# Altium PCB mainPCB.PcbDoc
Units mm, origin at the board's own origin, x right, y up, seen from the top; angles counter-clockwise.
Board outline 100 x 50 mm, 2 copper layers (Top Layer, Bottom Layer); 13 components, 5 nets, 76 pads, 0 vias.
Unrouted connection lines stored in the file: 1.
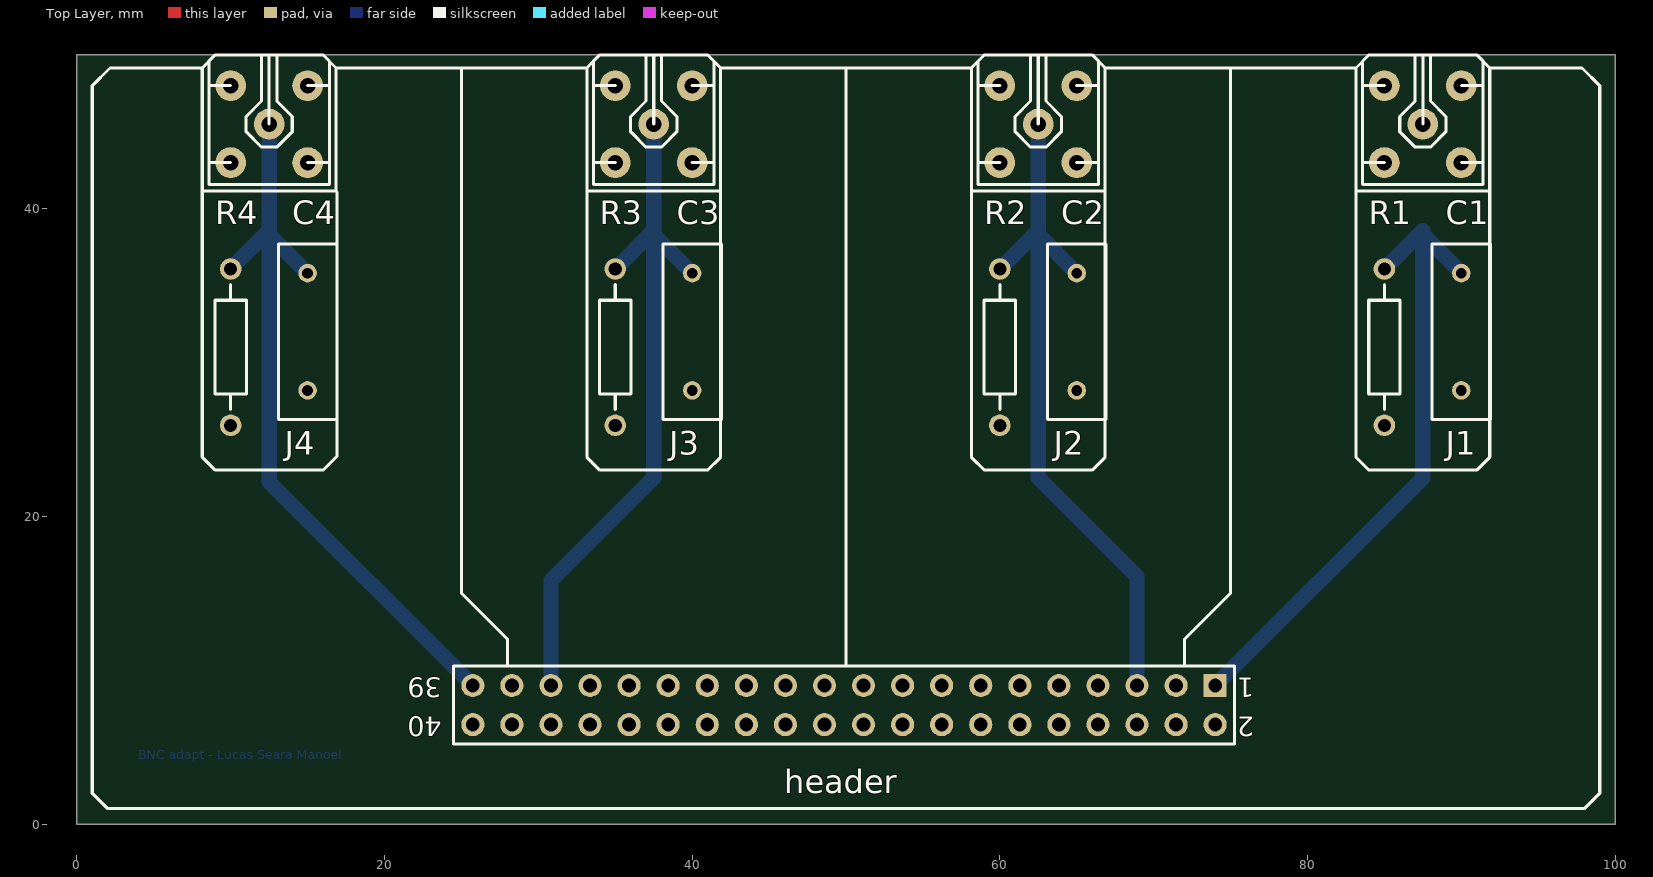
[diagram p0: Top Layer view]
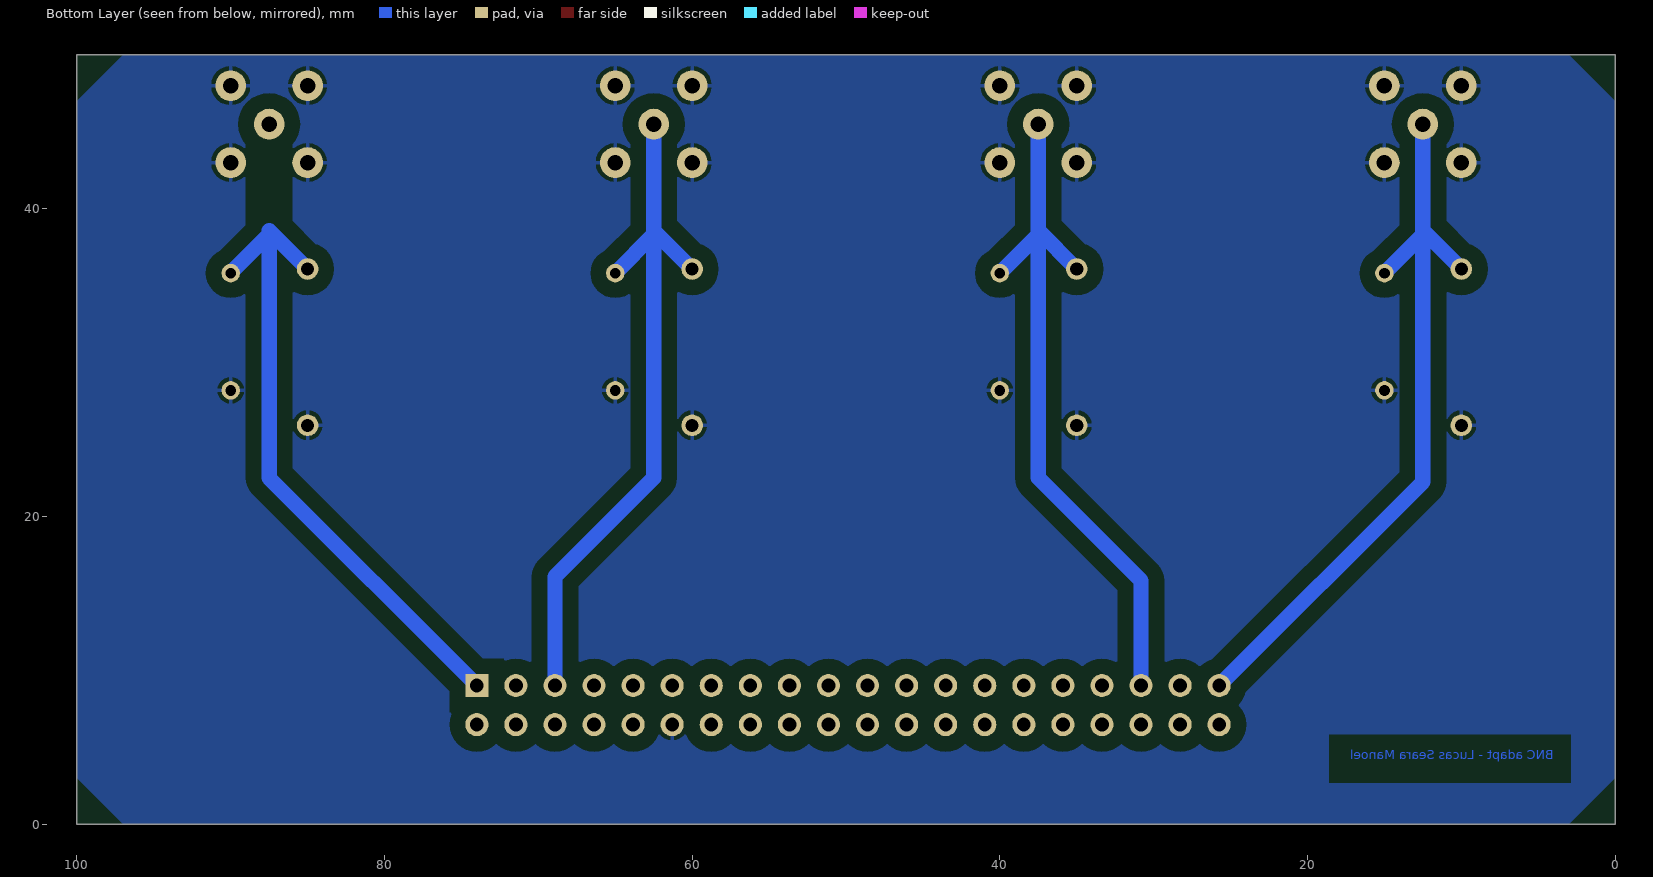
[diagram p1: Bottom Layer view, seen from below]

## Layer stack, top to bottom
Top Solder: solder mask 0.0102, Solder Resist, Dk 3.5
Top Layer: signal copper 0.0356
Dielectric 1: dielectric 0.32, FR-4, Dk 4.8
Bottom Layer: signal copper 0.0356
Bottom Solder: solder mask 0.0102, Solder Resist, Dk 3.5

## Board outline
0,0 0,50 100,50 100,0

## Design rules (kind name [scope] priority, off if disabled: settings)
Clearance [All] p1: gap=1
PolygonConnect [All] p1: connectstyle=Relief reliefconductorwidth=0.254 reliefentries=4 polygonreliefangle="90 Angle" airgapwidth=0.254
RoutingVias [All] p1: holewidth=0.711 width=1.27 viastyle="Through Hole" minholewidth=0.711 minwidth=1.27 maxholewidth=0.711 maxwidth=1.27
SolderMaskExpansion [All] p1: expansion=0.102
Width [All] p1: maxlimit=2 minlimit=1 preferedwidth=2
30 further rules are at their usual default settings.

## Components (designator, comment, footprint, x,y, rotation, side; value= is the part's Value field where it differs from the comment)
C1 "Cap" RAD-0.3 90,32 r90 top
C2 "Cap" RAD-0.3 65,32 r90 top
C3 "Cap" RAD-0.3 40,32 r90 top
C4 "Cap" RAD-0.3 15,32 r90 top
header "Header 20X2" HDR2X20 74,9 r180 top
J1 "COAX-F" bnc50_5pins 85,43 r0 top
J2 "COAX-F" bnc50_5pins 60,43 r0 top
J3 "COAX-F" bnc50_5pins 35,43 r0 top
J4 "COAX-F" bnc50_5pins 10,43 r0 top
R1 "Res2" AXIAL-0.4 85,31 r90 top
R2 "Res2" AXIAL-0.4 60,31 r90 top
R3 "Res2" AXIAL-0.4 35,31 r90 top
R4 "Res2" AXIAL-0.4 10,31 r90 top

## Footprints (in the part's own frame and the unit in brackets; to place one, negate y for a bottom-side part, rotate by r counter-clockwise, add the part's x,y. Pads: shape width x height; smd on the part's side, far side on the other; paste and mask are expansions set on the pad)
AXIAL-0.4 [mm] "Axial Device, Thru-Hole; 2 Leads; 0.4 in Pin Spacing"
  round 1.4 hole 0.85: 1(-5.08,0) 2(5.08,0)
  silkscreen extent -4.06,-1.02 4.06,1.02
bnc50_5pins [mm]
  round 2 hole 1: 1(2.5,2.5) 2(0,0) 3(0,5) 4(5,0) 5(5,5)
  silkscreen extent -1.85,-1.85 6.85,7, body extent -2.96,-1.7 7.96,20.75, height 10.46
HDR2X20 [mm] "Connector; Header; 20x2 Position"
  rect 1.5x1.5 hole 0.9: 1(0,0)
  round 1.5 hole 0.9: 2(0,2.54) 3(2.54,0) 4(2.54,2.54) 5(5.08,0) 6(5.08,2.54) 7(7.62,0) 8(7.62,2.54) 9(10.16,0) 10(10.16,2.54) 11(12.7,0) 12(12.7,2.54) 13(15.24,0) 14(15.24,2.54) 15(17.78,0) 16(17.78,2.54) 17(20.32,0) 18(20.32,2.54) 19(22.86,0) 20(22.86,2.54) 21(25.4,0) 22(25.4,2.54) 23(27.94,0) 24(27.94,2.54) 25(30.48,0) 26(30.48,2.54) 27(33.02,0) 28(33.02,2.54) 29(35.56,0) 30(35.56,2.54) 31(38.1,0) 32(38.1,2.54) 33(40.64,0) 34(40.64,2.54) 35(43.18,0) 36(43.18,2.54) 37(45.72,0) 38(45.72,2.54) 39(48.26,0) 40(48.26,2.54)
  silkscreen extent -1.27,-1.27 49.53,3.81
RAD-0.3 [mm] "Radial Cap, Thru-Hole; 2 Leads; 0.3 in Pin Spacing"
  round 1.2 hole 0.7: 1(-3.81,0) 2(3.81,0)
  silkscreen extent -5.71,-1.91 5.71,1.91

## Part data
C1 C2 C3 C4: "Capacitor"
header: "Header, 20-Pin, Dual row"
J1 J2 J3 J4: "RF Coaxial PCB Connector, MCX; Thru-Hole, Right-Angle Mount Socket, Blunt Post Terminal, 50 Ohm Impedance"
R1 R2 R3 R4: "Resistor"

## Nets (pads, with @x,y where several pads share a name; then routed paths per layer and width w, separated by ;. In a path a pad name is that pad's centre, name@x,y a point inside that pad or via, vN(x,y) a via of type N, cw(c..) or ccw(c..) an arc to the next point about the centre after c; other vN are vias at no path point)
GND: C1.1 C2.1 C3.1 C4.1 header.12 J1.2 J1.3 J1.4 J1.5 J2.2 J2.3 J2.4 J2.5 J3.2 J3.3 J3.4 J3.5 J4.2 J4.3 J4.4 J4.5 R1.1 R2.1 R3.1 R4.1
INPUT_1: C1.2 header.1 J1.1 R1.2 | length 42.2
  Bottom Layer w1: header.1 87.5,22.5 87.5,38.31 ; R1.2 87.5,38.58 87.5,38.31 ; C1.2 87.5,38.31
INPUT_2: C2.2 header.5 J2.1 R2.2 | length 46.2
  Bottom Layer w1: R2.2 62.5,38.58 ; J2.1 62.5,38.58 ; C2.2 62.5,38.31 ; header.5 68.92,16.08 62.5,22.5 62.5,38.31 ; 62.5,38.31 62.5,38.58
INPUT_3: C3.2 header.35 J3.1 R3.2 | length 46.3
  Bottom Layer w1: header.35 30.82,15.82 37.5,22.5 37.5,38.31 ; R3.2 37.5,38.58 ; J3.1 37.5,38.58 ; C3.2 37.5,38.31 ; 37.5,38.31 37.5,38.58
INPUT_4: C4.2 header.39 J4.1 R4.2 | length 49.1
  Bottom Layer w1: R4.2 12.5,38.58 ; J4.1 12.5,38.58 ; C4.2 12.5,38.31 ; header.39 12.5,22.24 12.5,38.31 ; 12.5,38.31 12.5,38.58
pads on no net: header.2 header.3 header.4 header.6 header.7 header.8 header.9 header.10 header.11 header.13 header.14 header.15 header.16 header.17 header.18 header.19 header.20 header.21 header.22 header.23 header.24 header.25 header.26 header.27 header.28 header.29 header.30 header.31 header.32 header.33 header.34 header.36 header.37 header.38 header.40

## Polygon pours and split planes (outlines as drawn)
GND on Bottom Layer "Bottom Layer-No Net" (solid, pour order 10): 0,3 3,0 97,0 100,3 100,47 97,50 3,50 0,47 0,3

## Other copper
Bottom Layer:
  text "BNC adapt - Lucas Seara Manoel" at 4,4 h1.02

## Silkscreen, mask and mechanical layers (free items; w line width, h text height)
Top Overlay:
  lines w0.2: 8.15,41.15 8.15,23.85 9,23 16,23 16.905,23.905 16.905,41.095 16.85,41.15 ; 8.15,49.15 2.15,49.15 1,48 1,2 2,1 98,1 99,2 99,48 97.85,49.15 91.85,49.15 ; 16.85,49.15 33.15,49.15 ; 25,49.15 25,15 28,12 28,10.27 ; 33.15,41.15 33.15,23.85 34,23 41,23 41.85,23.85 41.85,41.15 ; 41.85,49.15 58.15,49.15 ; 50,10.27 50,49 ; 58.15,41.15 58.15,23.85 59,23 66,23 66.85,23.85 66.85,41.15 ; 66.85,49.15 83.15,49.15 ; 72,10.27 72,12 75,15 75,49.15 ; 83.15,41.15 83.15,23.85 84,23 91,23 91.85,23.85 91.85,41.15
Mechanical 1:
  the board outline again, w0.2

## Text inside footprints (layer, text, board x,y; h text height)
header: Top Overlay "1" at 76.54,9.508 h1.27 r180; Top Overlay "2" at 76.54,6.968 h1.27 r180; Top Overlay "40" at 23.708,6.968 h1.27 r180; Top Overlay "39" at 23.708,9.508 h1.27 r180